# Altium PCB PCB1 asu racing team solo mission.PcbDoc
Units mm, origin at the board's own origin, x right, y up, seen from the top; angles counter-clockwise.
Board outline 44 x 44 mm, 4 copper layers (L1 (SIGNAL), L2 (GND), L3 (GND), L4 (Signal)), stack 1.57 mm thick; 35 components, 26 nets, 195 pads, 160 vias.
Unrouted connection lines stored in the file: 4.
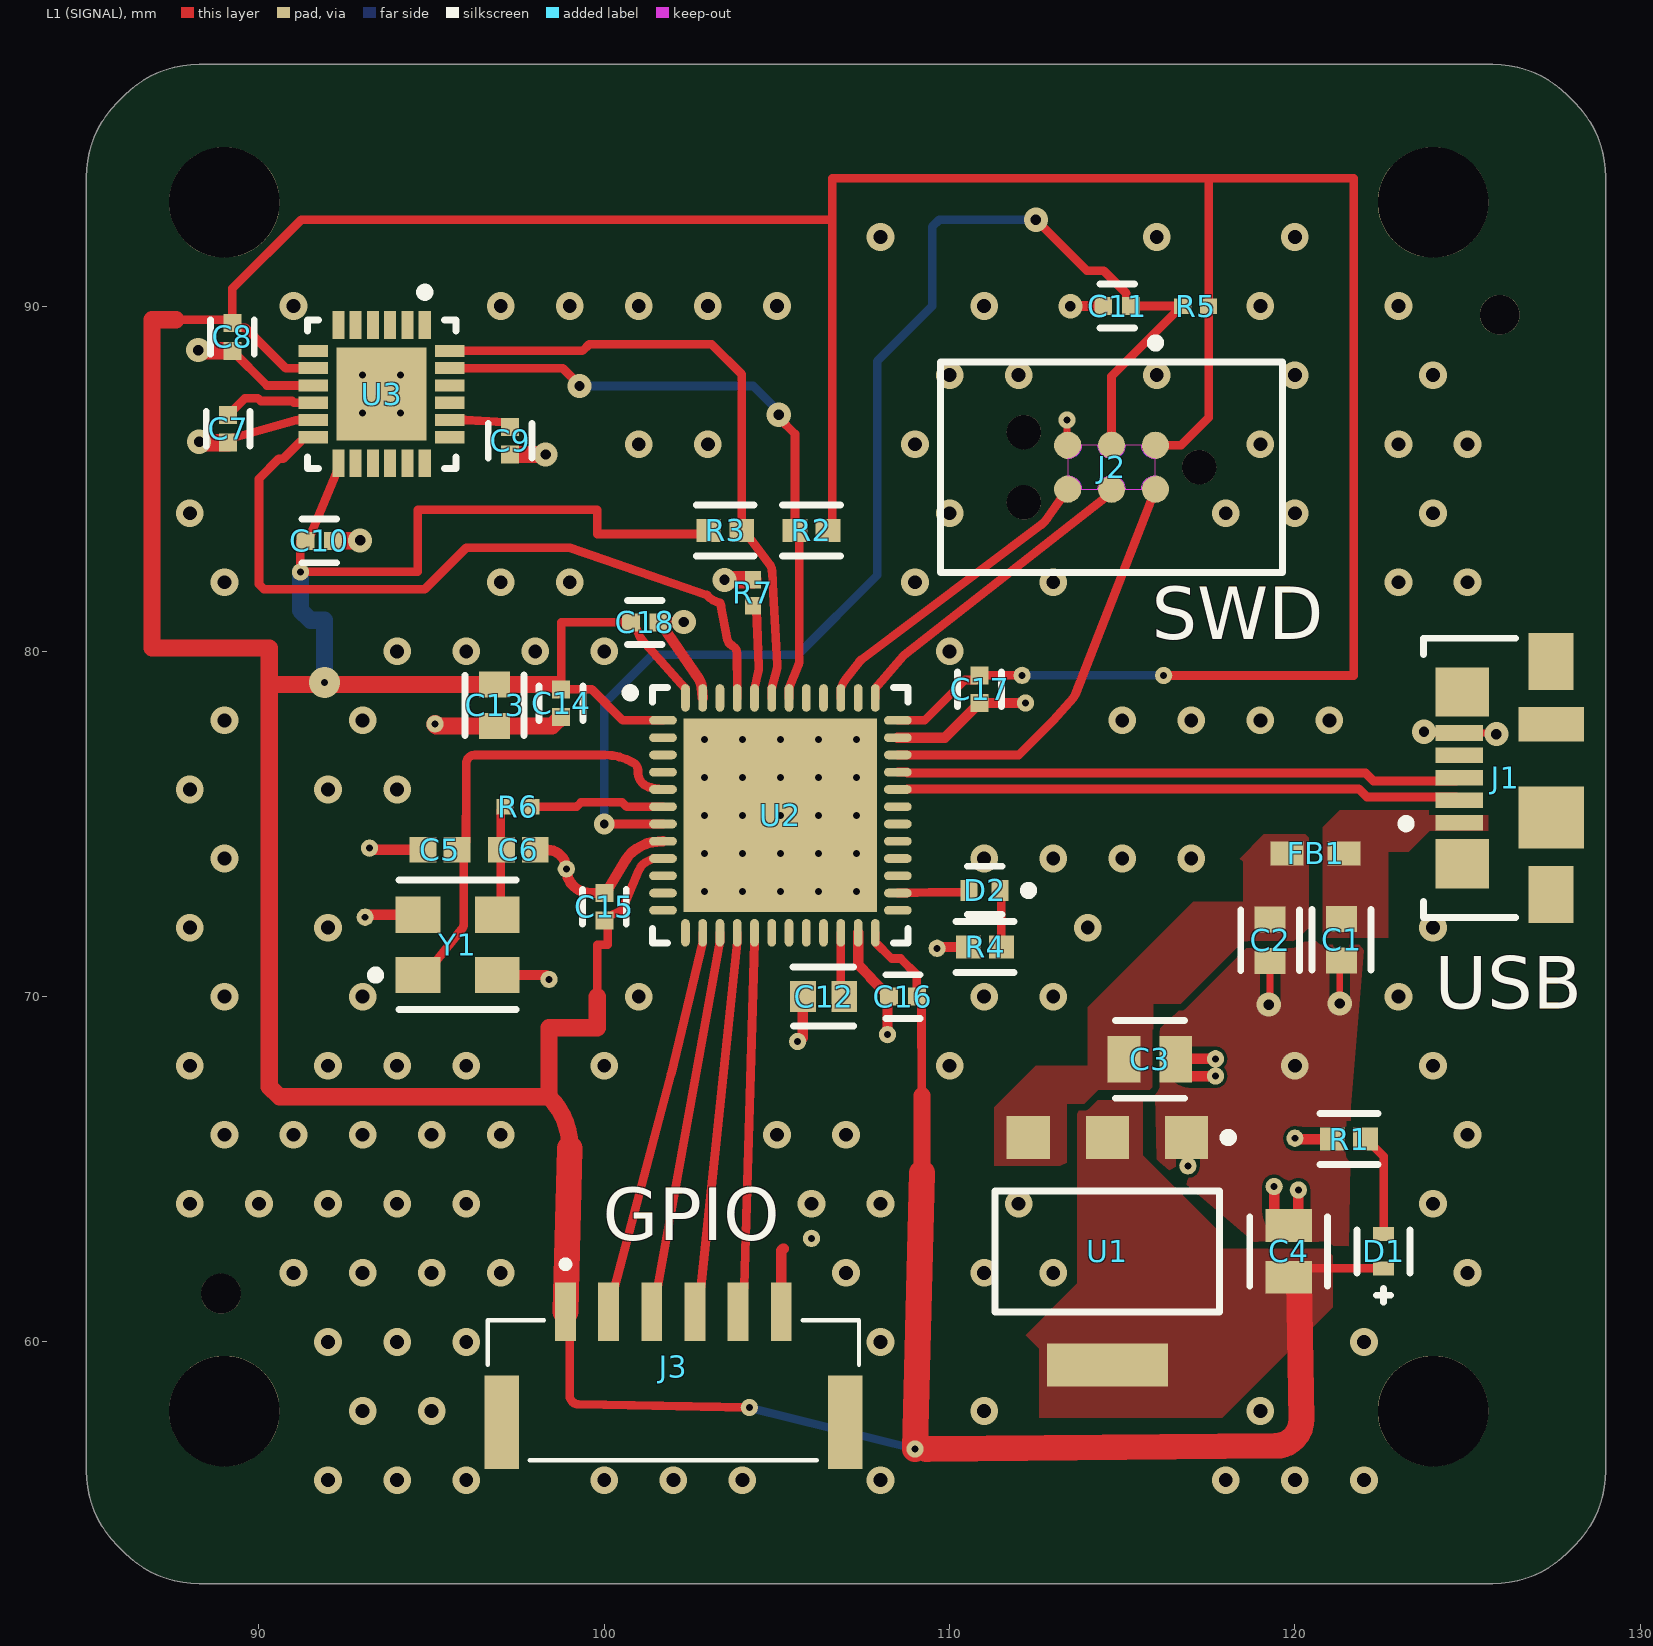
[diagram p0: L1 (SIGNAL) view]
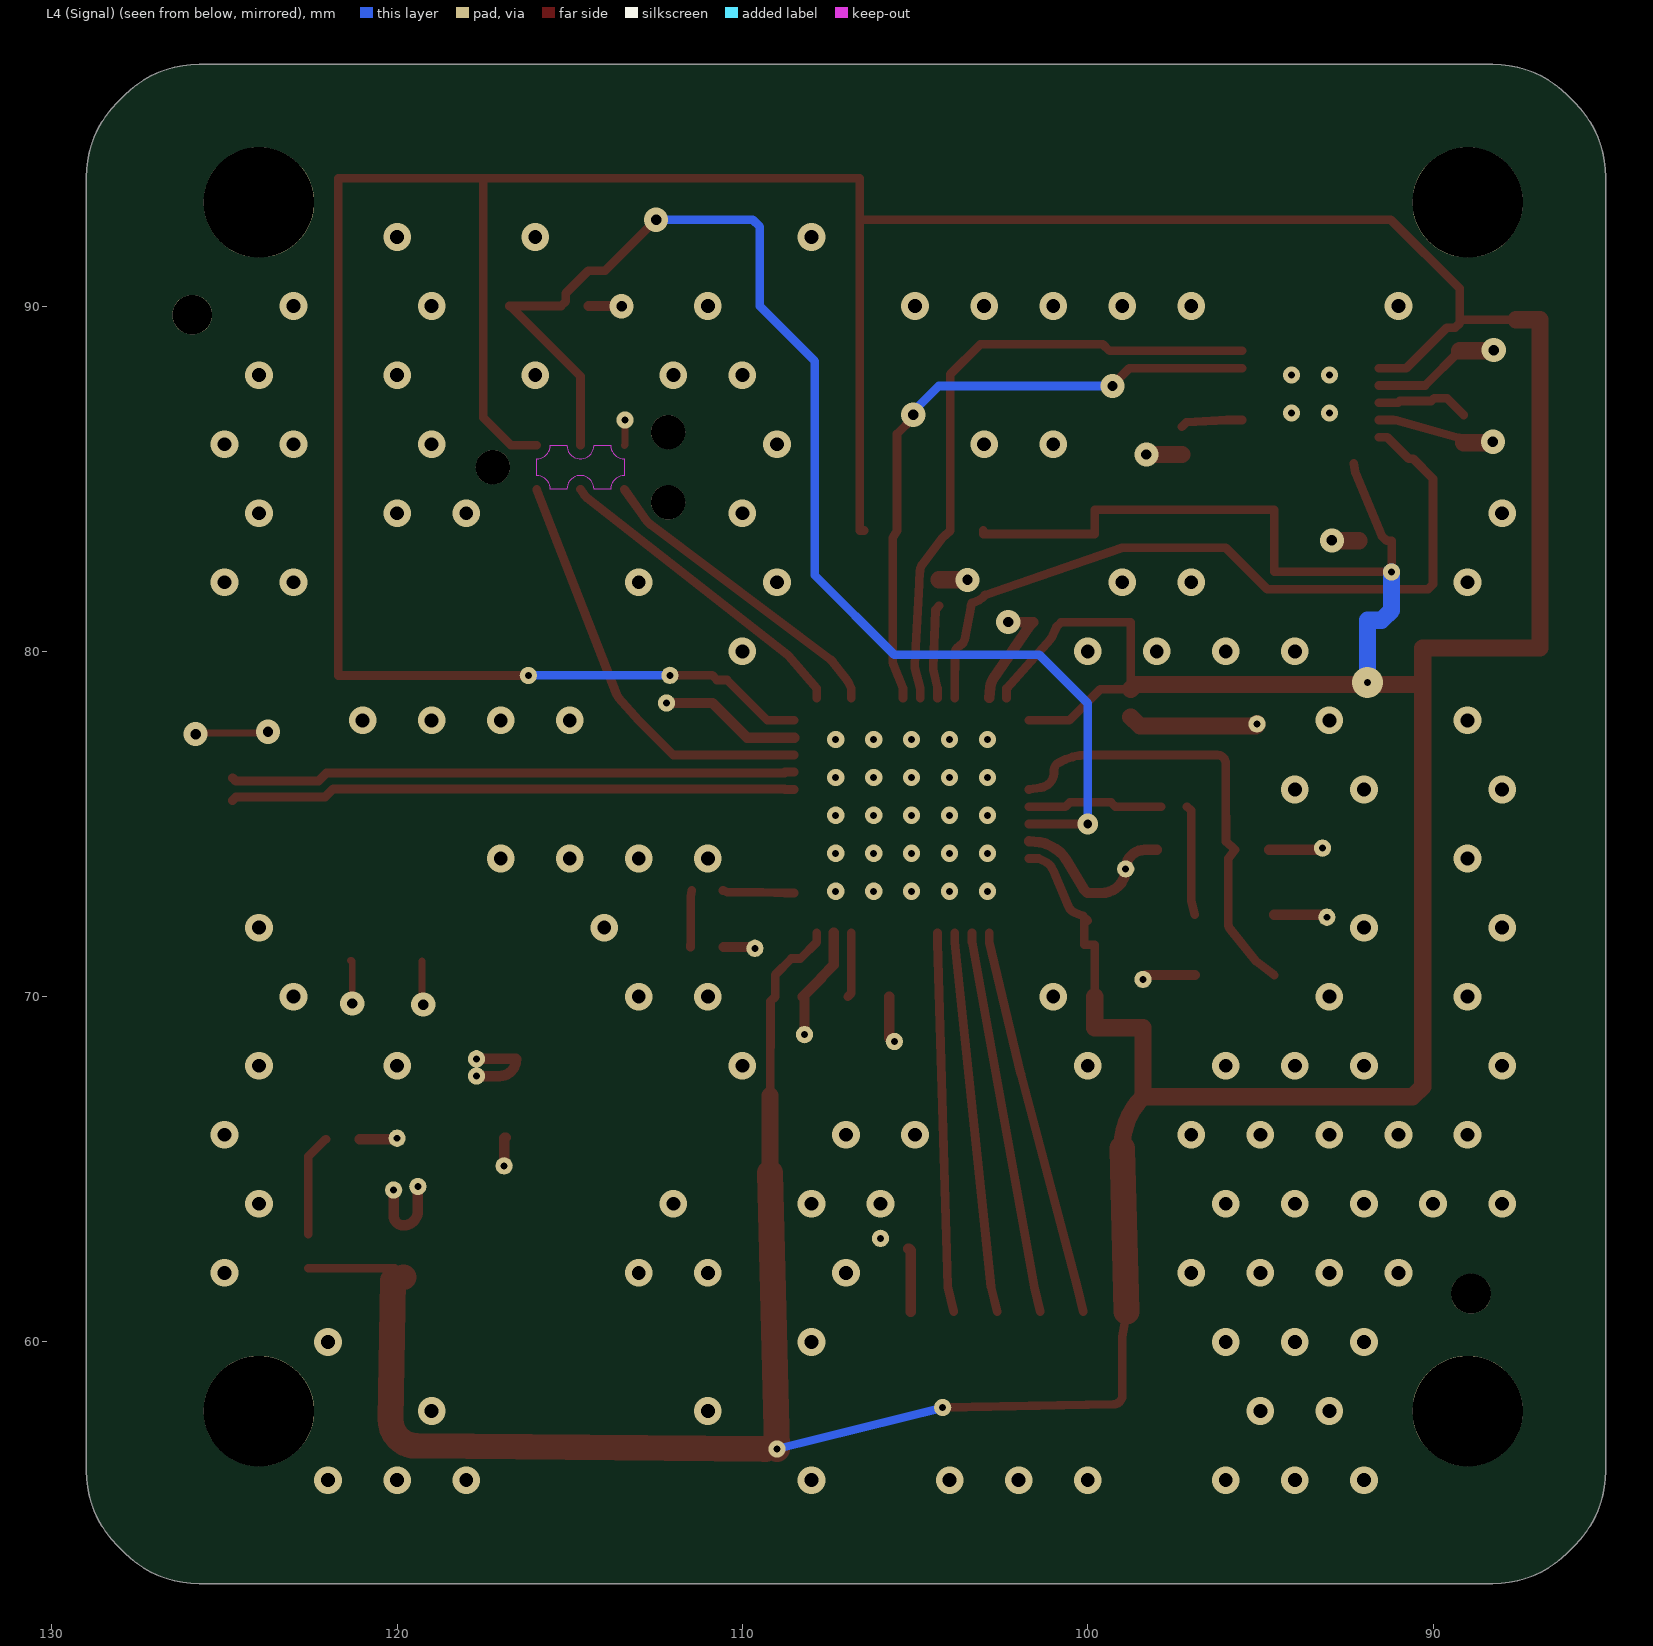
[diagram p1: L4 (Signal) view, seen from below]
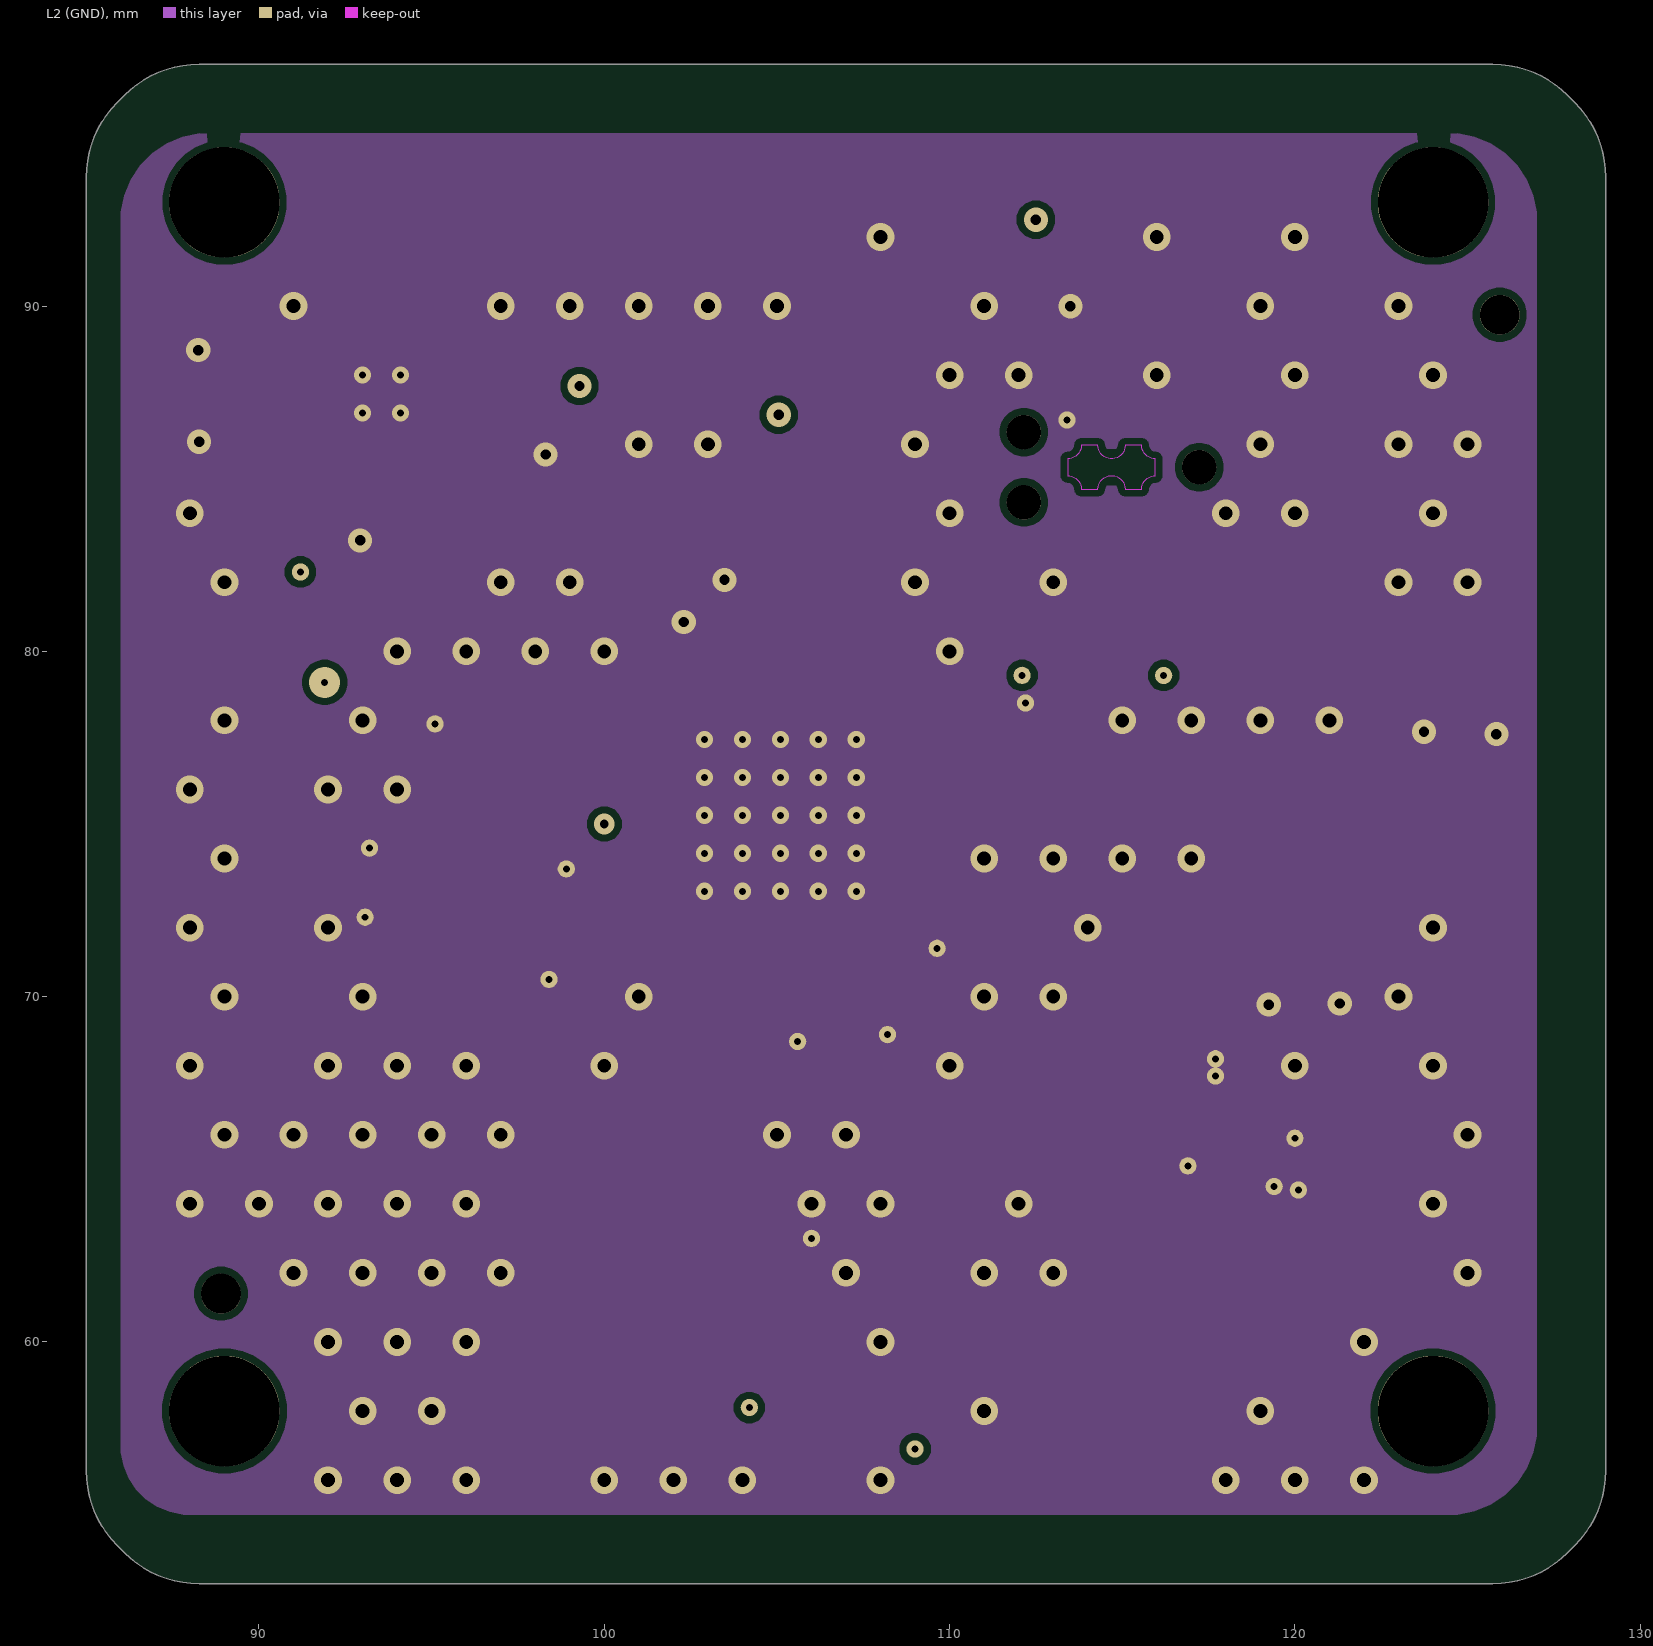
[diagram p2: L2 (GND)]
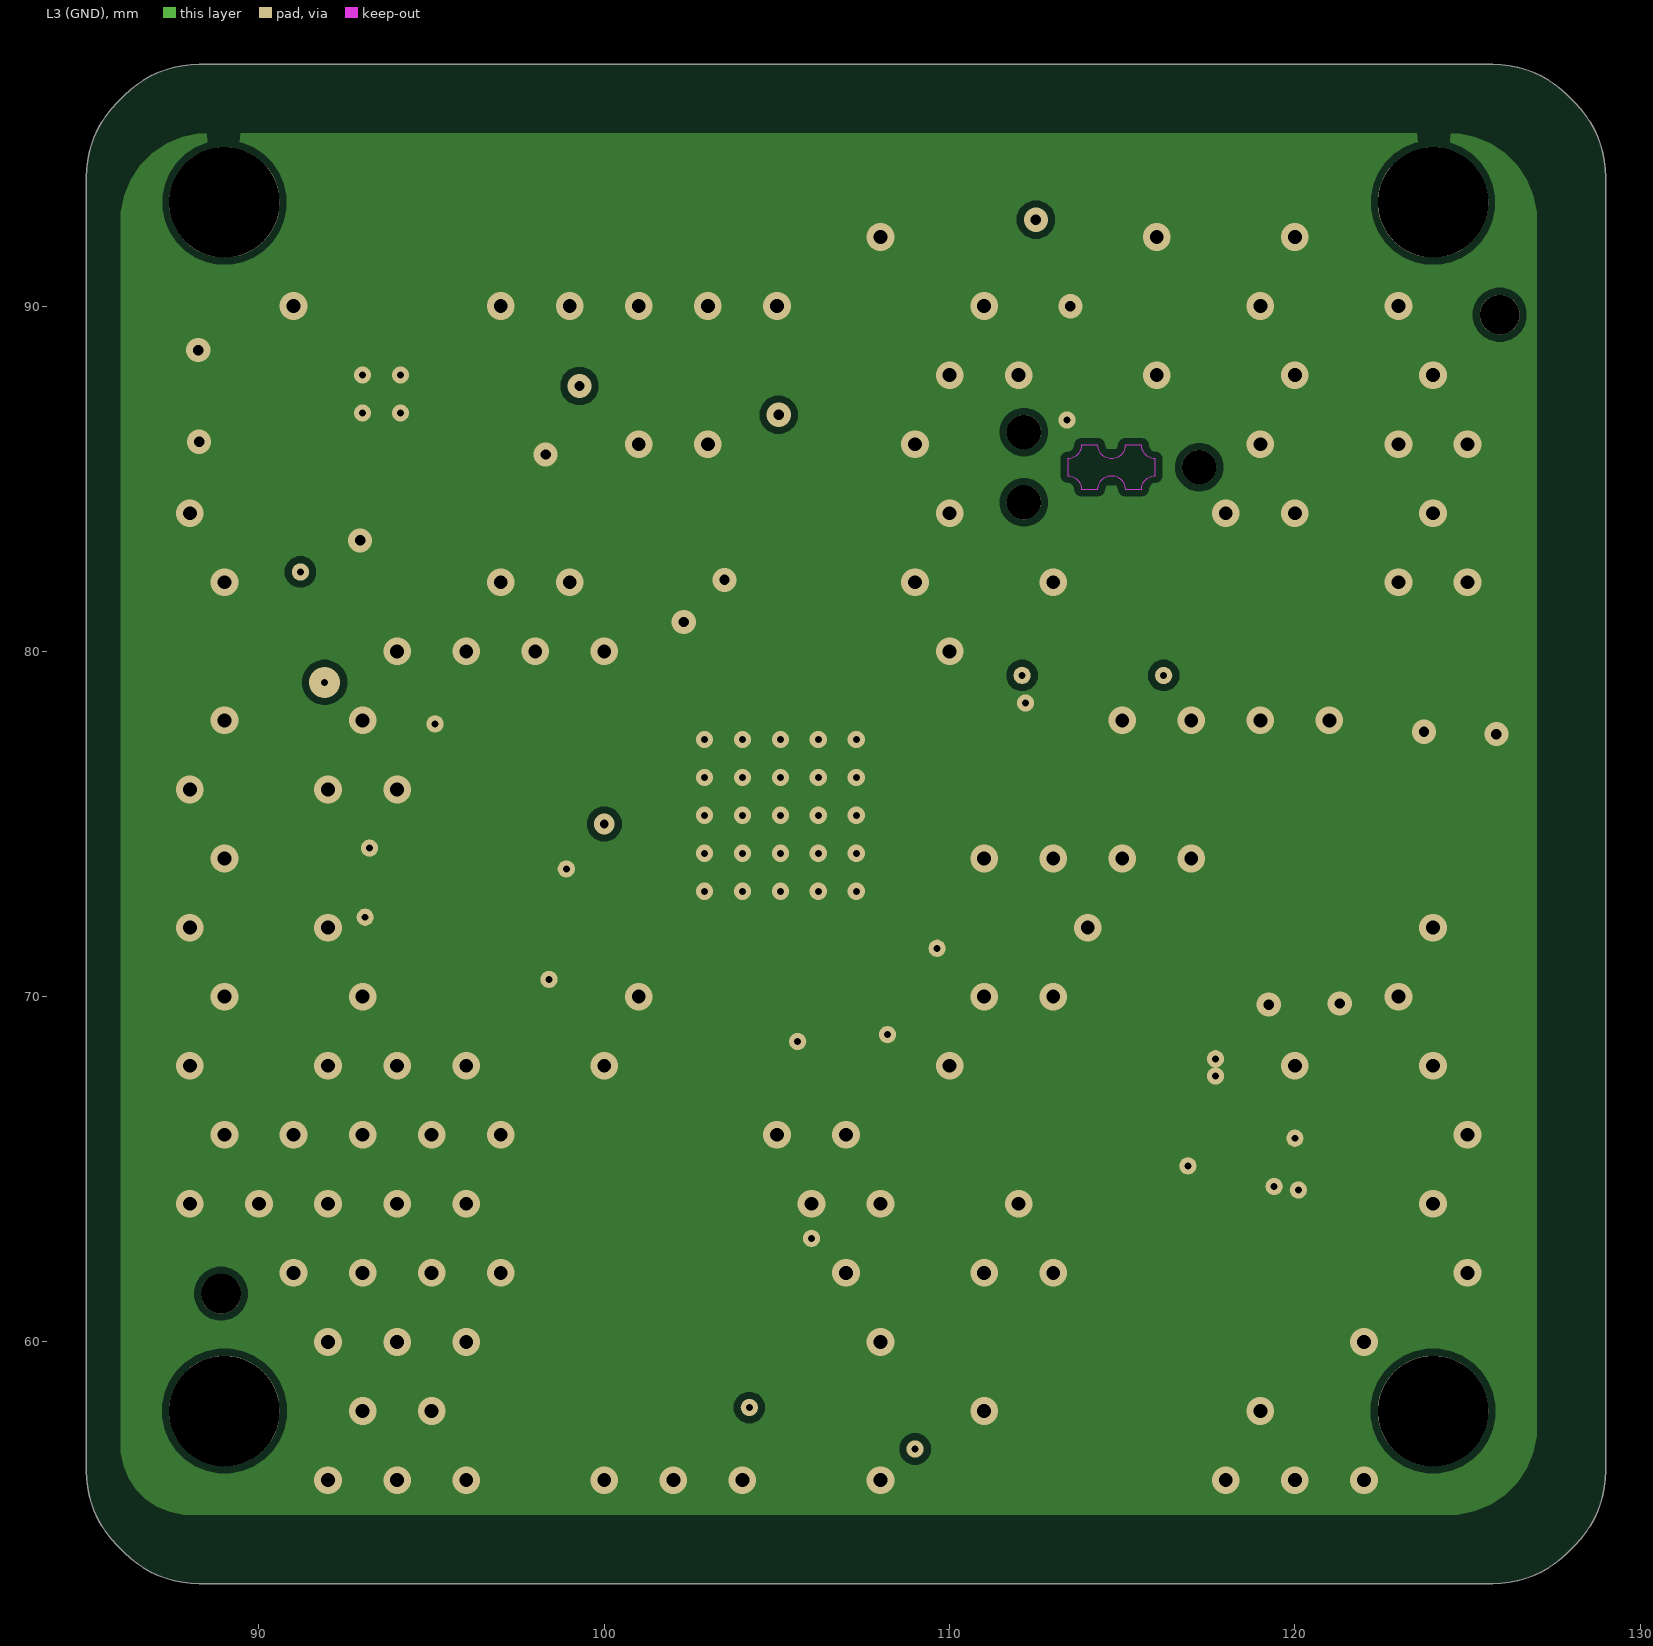
[diagram p3: L3 (GND)]
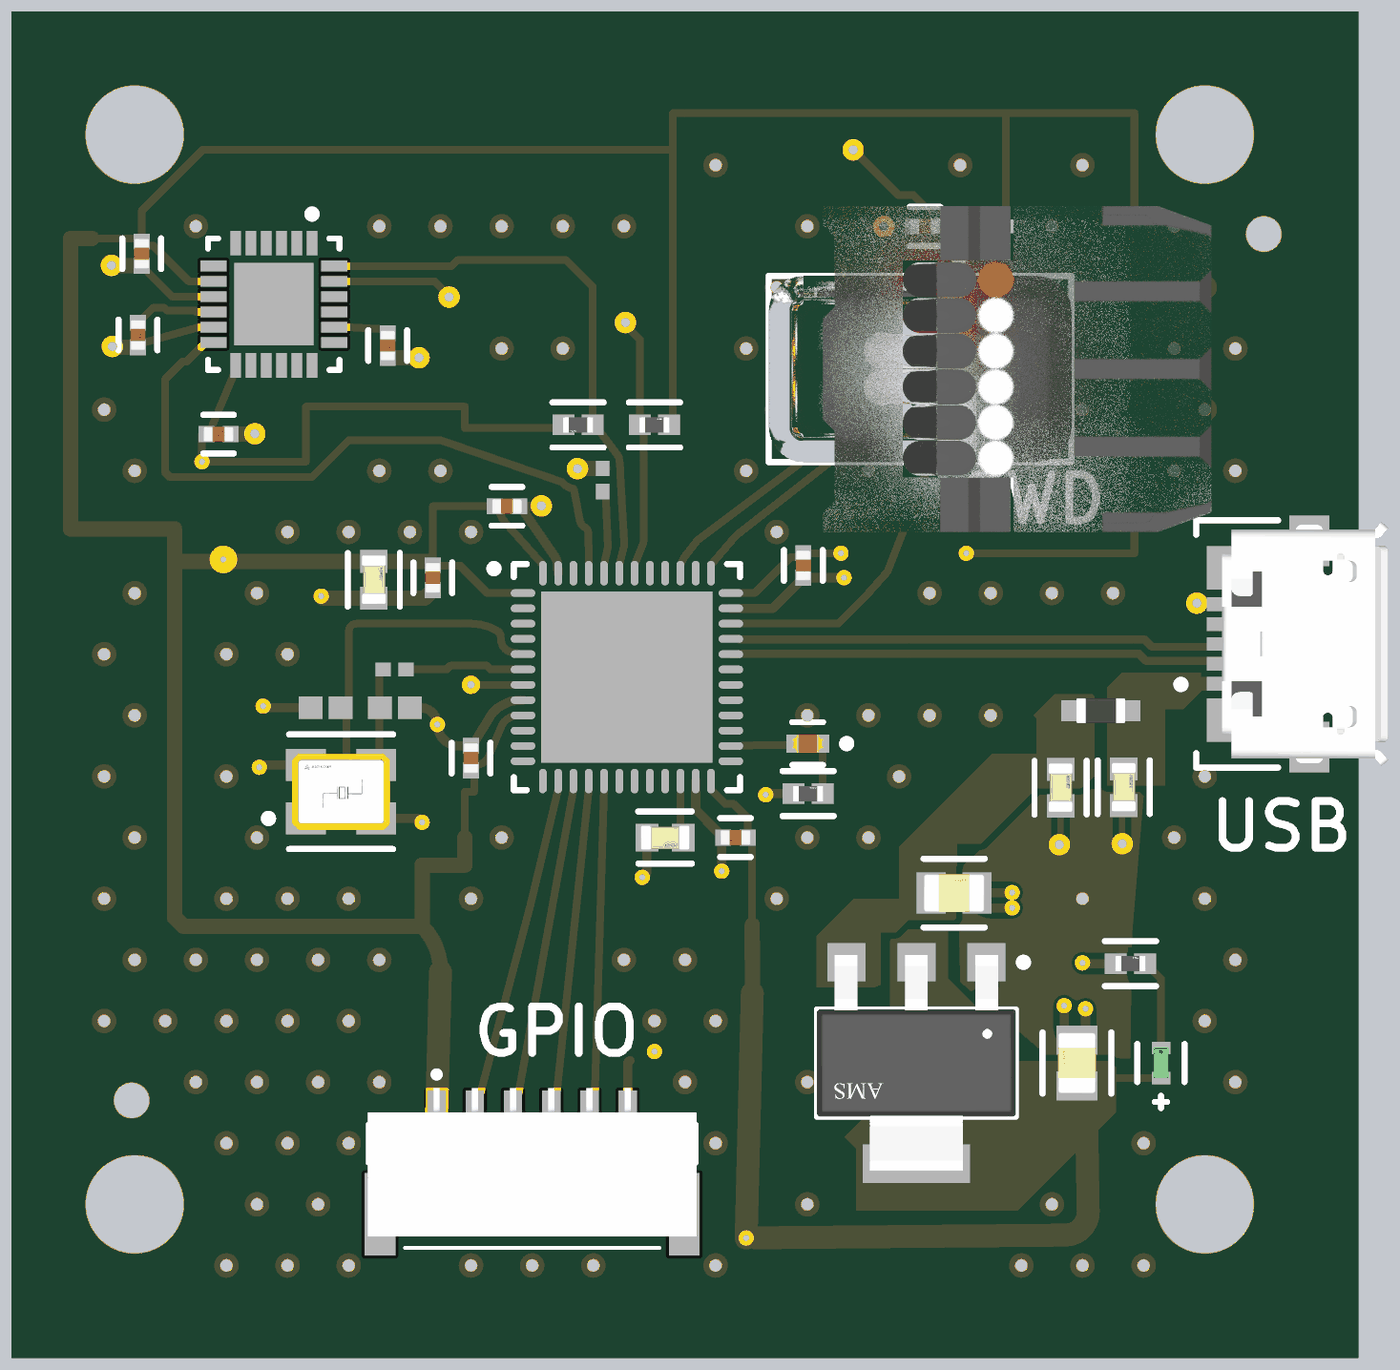
[diagram p4: 3D render of the assembled board from above, using the file's embedded part models]

## Layer stack, top to bottom
Top Solder: solder mask 0.0254, SM-001, Dk 4
L1 (SIGNAL): signal copper 0.035
Dielectric 1: prepreg 0.2, PP-017, Dk 4.6
L2 (GND): signal copper 0.0175
Dielectric 3: core 1.065, Core-039, Dk 4.6
L3 (GND): signal copper 0.0175
Dielectric 5: prepreg 0.2, PP-017, Dk 4.6
L4 (Signal): signal copper 0.035
Bottom Solder: solder mask 0.0254, SM-001, Dk 4

## Board outline
85.898,54.102 cw(c88.066,56.27) 85,56.27 85,93.73 cw(c88.066,93.73) 85.898,95.898 86.102,96.102 cw(c88.27,93.934) 88.27,97 125.73,97 cw(c125.73,93.934) 127.898,96.102 128.102,95.898 cw(c125.934,93.73) 129,93.73 129,56.27 cw(c125.934,56.27) 128.102,54.102 127.898,53.898 cw(c125.73,56.066) 125.73,53 88.27,53 cw(c88.27,56.066) 86.102,53.898

## Design rules (kind name [scope] priority, off if disabled: settings)
Clearance [All] p1: gap=0.2 ignorepadtopadclearanceinfootprint=FALSE
DiffPairsRouting [All] p1: maxlimit=0.254 minlimit=0.203 mostfreqgap=0.254 toplayer_maxgap=0.203 toplayer_prefgap=0.203 toplayer_minwidth=0.26 toplayer_maxwidth=0.26 toplayer_prefwidth=0.26 bottomlayer_maxgap=0.203 bottomlayer_prefgap=0.203 bottomlayer_minwidth=0.26 bottomlayer_maxwidth=0.26 bottomlayer_prefwidth=0.26 impedanceprofiledriven=TRUE impedanceprofileid={2AADE8E3-8F08-4A78-8AD9-7687EE1D7112} impedanceprofilevalue=90.000000 maxuncoupledlength=12.7
PolygonConnect [All] p1: connectstyle=Direct reliefconductorwidth=0.254 reliefentries=4 polygonreliefangle="90 Angle" airgapwidth=0.254
RoutingVias [All] p1: holewidth=0.3 width=0.7 viastyle="Through Hole" minholewidth=0.25 minwidth=0.55 maxholewidth=0.4 maxwidth=0.9
SolderMaskExpansion [All] p1: expansion=0 istentingtop=FALSE
SupplyNets "Schematic Supply Nets_3" [InNet('VBUS')] p1: voltage=0.000
SupplyNets "Schematic Supply Nets_2" [InNet('GND')] p2: voltage=0.000
SupplyNets "Schematic Supply Nets_1" [InNet('+5V')] p3: voltage=0.000
SupplyNets "Schematic Supply Nets" [InNet('+3V3')] p4: voltage=0.000
UnRoutedNet [All] p1: checkbadconnections=TRUE
Width [All] p1: maxlimit=1 minlimit=0.2 preferedwidth=0.3 midlayer1_minwidth=0.254 midlayer1_maxwidth=0.254 midlayer1_prefwidth=0.254 midlayer2_minwidth=0.254 midlayer2_maxwidth=0.254 midlayer2_prefwidth=0.254 minimp=50.000000 maximp=50.000000 favimp=50.000000
28 further rules are at their usual default settings.

## Classes and differential pairs
differential pair class DIFF_USB: USB_D
differential pair USB_D: +USB_D_P -USB_D_N

## Components (designator, comment, footprint, x,y, rotation, side; value= is the part's Value field where it differs from the comment)
C1 "2u2" FP-C0603C-CF-MFG 121.35,71.65 r270 top value="0.10 μF"
C2 "2u2" FP-C0603C-CF-MFG 119.284,71.636 r270 top value="0.10 μF"
C3 "22u" FP-C0805C106K4PACTU-MFG 115.8,68.184 r0 top
C4 "22u" FP-C0805C106K4PACTU-MFG 119.818,62.625 r90 top
C5 "10p" CAPC1005X56X25ML10T15 95.24,74.25 r0 top
C6 "10p" CAPC1005X56X25ML10T15 97.51,74.25 r180 top
C7 "100n" FP-C0402-BB-MFG 89.107,86.444 r270 top value="22 pF"
C8 "10n" FP-C0402-BB-MFG 89.229,89.104 r270 top value="22 pF"
C9 "2n2" FP-C0402-BB-MFG 97.275,86.1 r270 top value="22 pF"
C10 "100n" FP-C0402-BB-MFG 91.742,83.2 r0 top value="22 pF"
C11 "100n" FP-C0402-BB-MFG 114.85,90 r180 top value="22 pF"
C12 "2u2" FP-C0603C-CF-MFG 106.35,70 r180 top value="0.10 μF"
C13 "2u2" FP-C0603C-CF-MFG 96.824,78.438 r270 top value="0.10 μF"
C14 "100n" FP-C0402-BB-MFG 98.75,78.5 r270 top value="22 pF"
C15 "100n" FP-C0402-BB-MFG 100,72.6 r90 top value="22 pF"
C16 "100n" FP-C0402-BB-MFG 108.65,70 r180 top value="22 pF"
C17 "100n" FP-C0402-BB-MFG 110.869,78.905 r270 top value="22 pF"
C18 "100n" FP-C0402-BB-MFG 101.176,80.839 r0 top value="22 pF"
D1 "SM0402GC" FP-SM0402GC-MFG 122.568,62.625 r90 top
D2 "SML-P12VTT86R" FP-SML-P1-MFG 111.012,73.075 r180 top
FB1 "120R" "WE-CBF HF_0603_HC" 120.6,74.15 r180 top
J1 "473460001" FP-473460001-MFG 127.07,76.335 r90 top
J2 "TC2030-CTX-NL" FP-TC2030-CTX-NL-MFG 114.69,85.332 r180 top
J3 "SM06B-GHS-TB" JST_SM06B-GHS-TB 102,59 r0 top
R1 "1k" FP-RC0402-0_4-IPC_A 121.568,65.875 r0 top
R2 "2k2" FP-RC0402-0_4-IPC_A 106,83.5 r0 top
R3 "2k2" FP-RC0402-0_4-IPC_A 103.5,83.5 r180 top
R4 "1k" FP-RC0402-0_4-IPC_A 111.026,71.439 r0 top
R5 "10k" RESC1005X40X25LL05T10 117.125,90 r0 top
R6 "0R" RESC1005X40X25LL05T10 97.5,75.5 r0 top
R7 "10k" RESC1005X40X25LL05T10 104.306,81.696 r270 top
U1 "AMS1117-3.3" FP-AMS1117-IPC_C 114.568,62.625 r270 top
U2 "STM32F411CEU6" STM-UFQFPN48_L 105.1,75.25 r0 top
U3 "MPU-6050" IS-QFN-24_V 93.55,87.45 r270 top
Y1 "24MHZ" FP-ABM8-MFG 95.75,71.5 r0 top

## Footprints (in the part's own frame and the unit in brackets; to place one, negate y for a bottom-side part, rotate by r counter-clockwise, add the part's x,y. Pads: shape width x height; smd on the part's side, far side on the other; paste and mask are expansions set on the pad)
CAPC1005X56X25ML10T15 [mm] "Chip Capacitor, 2-Leads, Body 1.00x0.50mm, IPC Low Density"
  rect 0.78x0.74 smd: 1(-0.49,0) 2(0.49,0)
  body extent -0.55,-0.3 0.55,0.3, height 0.56
FP-473460001-MFG [mm]
  rect 0.45x1.38 smd paste+0 mask+0: 1(-1.3,2.31) 2(-0.65,2.31) 3(0,2.31) 4(0.65,2.31) 5(1.3,2.31)
  rect 1.425x1.55 smd paste+0 mask+0: 6(-2.487,2.225) 7(2.488,2.225)
  rect 1.65x1.3 smd paste+0 mask+0: 8(-3.375,-0.35) 11(3.375,-0.35)
  rect 1.8x1.9 smd paste+0 mask+0: 9(-1.15,-0.35)
  rect 1x1.9 smd paste+0 mask+0: 10(1.55,-0.35)
  silkscreen extent -4.05,0.67 4.04,3.97, body extent -4.3,-2.48 4.3,3.45, height 0.25
FP-ABM8-MFG [mm]
  rect 1.3x1.05 smd paste+0 mask+0: 1(-1.15,-0.875) 2(1.15,-0.875) 3(1.15,0.875) 4(-1.15,0.875)
  silkscreen extent -2.5,-1.87 1.7,1.88, body extent -1.9,-1.5 1.9,1.5, height 0.25
FP-AMS1117-IPC_C [mm]
  rect 1.25x1.25 smd paste+0 mask+0: 1(-3.295,2.29) 2(-3.295,0) 3(-3.295,-2.29)
  rect 1.25x3.5 smd paste+0 mask+0: 4(3.295,0)
  silkscreen extent -3.42,-3.25 1.75,3.63, body extent -3.9,-3.35 3.9,3.35, height 0.25
FP-C0402-BB-MFG [mm]
  rect 0.52x0.52 smd paste+0 mask+0: 1(-0.4,0) 2(0.4,0)
  silkscreen extent -0.5,-0.64 0.5,0.63, body extent -0.8,-0.4 0.8,0.4, height 0.25
FP-C0603C-CF-MFG [mm]
  rect 0.75x0.9 smd paste+0 mask+0: 1(-0.6,0) 2(0.6,0)
  silkscreen extent -0.87,-0.85 0.88,0.85, body extent -1.2,-0.6 1.2,0.6, height 0.25
FP-C0805C106K4PACTU-MFG [mm]
  rect 0.95x1.35 smd paste+0 mask+0: 1(-0.75,0) 2(0.75,0)
  silkscreen extent -1,-1.13 1,1.12, body extent -1.4,-0.85 1.4,0.85, height 0.25
FP-RC0402-0_4-IPC_A [mm]
  rect 0.715x0.672 smd paste+0 mask+0: 1(-0.479,0) 2(0.479,0)
  silkscreen extent -0.84,-0.74 0.84,0.74, body extent -1.04,-0.54 1.04,0.54, height 0.25
FP-SM0402GC-MFG [mil]
  rect 16x24 smd paste+0 mask+0: 1(-19.5,0) 2(19.5,0)
  silkscreen extent -58,-30 25,31, body extent -31,-18 31,18, height 10
FP-SML-P1-MFG [mm]
  rect 0.5x0.6 smd paste+0 mask+0: 1(-0.45,0) 2(0.45,0)
  silkscreen extent -1.4,-0.7 0.5,0.7, body extent -0.8,-0.43 0.8,0.43, height 0.25
FP-TC2030-CTX-NL-MFG [mil]
  round 30.98 smd paste-39370.1 mask+0: 1(-50,-25) 2(-50,25) 3(0,-25) 4(0,25) 5(50,-25) 6(50,25)
  round 39.02 hole 39.02 unplated paste-99999 mask+0: ""(-100,0) ""(100,-40) ""(100,40)
  Keep-Out Layer region: -34.51,-25 -15.49,-25 -13.96,-18.28 -9.66,-12.89 -3.45,-9.9 3.45,-9.9 9.66,-12.89 13.96,-18.28 15.49,-25 15.49,-25 34.51,-25 35.69,-19.07 39.05,-14.05 44.07,-10.69 50,-9.51 50,-9.51 50,9.51 44.07,10.69 39.05,14.05 35.69,19.07 34.51,25 34.51,25 15.49,25 13.96,18.28 9.66,12.89 3.45,9.9 -3.45,9.9 -9.66,12.89 -13.96,18.28 -15.49,25 -15.49,25 -34.51,25 -35.69,19.07 -39.05,14.05 -44.07,10.69 -50,9.51 -50,9.51 -50,-9.51 -44.07,-10.69 -39.05,-14.05 -35.69,-19.07 -34.51,-25
  silkscreen extent -195,-147 195,120, body extent -199,-124 199,124, height 10
IS-QFN-24_V [mm] "QFN, 24-Leads, Body 4x4mm, Pitch 0.5mm, Thermal Pad 2.7x2.6mm"
  rect 0.8x0.35 smd: 1(-2,1.25) 2(-2,0.75) 3(-2,0.25) 4(-2,-0.25) 5(-2,-0.75) 6(-2,-1.25) 13(2,-1.25) 14(2,-0.75) 15(2,-0.25) 16(2,0.25) 17(2,0.75) 18(2,1.25)
  rect 0.35x0.85 smd mask+0.102: 7(-1.25,-1.975) 8(-0.75,-1.975) 9(-0.25,-1.975) 10(0.25,-1.975) 11(0.75,-1.975) 12(1.25,-1.975) 19(1.25,1.975) 20(0.75,1.975) 21(0.25,1.975) 22(-0.25,1.975) 23(-0.75,1.975) 24(-1.25,1.975)
  rect 2.7x2.6 smd: 25(0,0)
  silkscreen extent -3.07,-2.15 2.15,2.15, body extent -2,-2 2,2, height 0.95
JST_SM06B-GHS-TB [mm]
  rect 0.6x1.7 smd paste+0 mask+0.102: 1(-3.125,1.875) 2(-1.875,1.875) 3(-0.625,1.875) 4(0.625,1.875) 5(1.875,1.875) 6(3.125,1.875)
  rect 1x2.7 smd paste+0 mask+0.102: MP1(-4.975,-1.325) MP2(4.975,-1.325)
  silkscreen extent -5.37,-2.43 5.37,3.35, body extent -5.38,-2.05 5.38,2.8, height 4.25
RESC1005X40X25LL05T10 [mm] "Chip Resistor, 2-Leads, Body 1.00x0.50mm, IPC High Density"
  rect 0.5x0.45 smd: 1(-0.375,0) 2(0.375,0)
  body extent -0.53,-0.27 0.53,0.28, height 0.4
STM-UFQFPN48_L [mm] "QFN, 48-Leads, Body 7.1x7.1mm, Pitch 0.5mm, Thermal Pad 5.6x5.6mm, IPC High Density"
  oval 0.8x0.25 smd: 1(-3.4,2.75) 2(-3.4,2.25) 3(-3.4,1.75) 4(-3.4,1.25) 5(-3.4,0.75) 6(-3.4,0.25) 7(-3.4,-0.25) 8(-3.4,-0.75) 9(-3.4,-1.25) 10(-3.4,-1.75) 11(-3.4,-2.25) 12(-3.4,-2.75) 25(3.4,-2.75) 26(3.4,-2.25) 27(3.4,-1.75) 28(3.4,-1.25) 29(3.4,-0.75) 30(3.4,-0.25) 31(3.4,0.25) 32(3.4,0.75) 33(3.4,1.25) 34(3.4,1.75) 35(3.4,2.25) 36(3.4,2.75)
  oval 0.25x0.8 smd: 13(-2.75,-3.4) 14(-2.25,-3.4) 15(-1.75,-3.4) 16(-1.25,-3.4) 17(-0.75,-3.4) 18(-0.25,-3.4) 19(0.25,-3.4) 20(0.75,-3.4) 21(1.25,-3.4) 22(1.75,-3.4) 23(2.25,-3.4) 24(2.75,-3.4) 37(2.75,3.4) 38(2.25,3.4) 39(1.75,3.4) 40(1.25,3.4) 41(0.75,3.4) 42(0.25,3.4) 43(-0.25,3.4) 44(-0.75,3.4) 45(-1.25,3.4) 46(-1.75,3.4) 47(-2.25,3.4) 48(-2.75,3.4)
  rect 5.6x5.6 smd: 49(0,0)
  silkscreen extent -4.47,-3.7 3.7,3.7, body extent -3.55,-3.55 3.55,3.55, height 0.6
"WE-CBF HF_0603_HC" [mm] "SMD EMI Suppression Ferrite  Bead, body 1.60x0.80mm"
  rect 0.95x0.7 smd: 1(-0.825,0) 2(0.825,0)
  body extent -0.8,-0.4 0.8,0.4, height 0.8

## Part data
C1 C2 C12 C13: library part CMP-2006-03811-3, "Capacitor; Ceramic; Cap; .100uF; Tol 10%; SMT; Vol-Rtg 16V; X7R; Tape and Reel", Capacitance="0.10 μF", Manufacturer=KEMET, Manufacturer Part Number=C0603C104K4RACTU, Package=C0603C-CF, Temperature="-55°C to +125°C", Temperature Characteristic=X7R, Temperature Coefficient=30ppm/°C, Temperature Range High=+125°C, Temperature Range Low=-55°C, Tolerance=0.1, Voltage Rating="16 V", Automotive=Yes, Automotive Grade="Grade 1", Category=Cap, ComponentLink2Description=Datasheet, ComponentLink2URL=https://api.kemet.com/component-edge/download/datasheet/C0603C100J5GACAUTO.pdf, Device Class L1="Passive Components", Device Class L2=Capacitors, Device Class L3="Ceramic Capacitors", Digikey Description="Capacitor; Ceramic; Cap; .100uF; Tol 10%; SMT; Vol-Rtg 16V; X7R; Tape and Reel", Height=0.87mm, Lead Free=Yes, Material=Ceramic, Mouser Description="Multilayer Ceramic Capacitors MLCC - SMD/SMT 16volts 0.1uF 10% X7R 10%", Octopart=https://octopart.com/c0603c104k4ractu-kemet-93067, RoHS=TRUE
C3 C4: library part CMP-03020-034671-1, "CAP CER 10UF 16V X5R 0805", Capacitance=10uF, Case Code (Imperial)=0805, Case Code (Metric)=2012, Dielectric=X5R, Dielectric Material=Ceramic, Max Operating Temperature=85°C, Min Operating Temperature=-55°C, Package Quantity=1, Tolerance=10%, Voltage=16V, Case/Package=0805, Construction=Flat, Contact Plating=Tin, Depth=1.25mm, Dissipation Factor=5%, Height=1.25mm, Lead Free="Lead Free", Length=2mm, Mount="Surface Mount", Number of Pins=2, Packaging="Tape and Reel", Radiation Hardening=No, REACH SVHC="No SVHC", Series=C, Termination=SMD/SMT, Thickness=0.055inch, Voltage Rating=16V, Voltage Rating (DC)=16V, Width=0.049inch
C5 C6: library part CMP-2008-02838-1, Manufacturer="AVX Interconnect / Elco", Part Number=0402YC821KAT2A
C7 C8 C9 C10 C11 C14 C15 C16 C17 C18: library part CMP-03020-013852-1, "C0402 22 pF X7R 10.00% 16 V", Capacitance="22 pF", Manufacturer=Kemet, Manufacturer Part Number=C0402C220K4RACTU, Package=C0402-BB, Temperature="-55°C to +125°C", Temperature Characteristic=X7R, Temperature Coefficient=15%, Temperature Range High=+125°C, Temperature Range Low=-55°C, Tolerance=0.1, Voltage Rating="16 V", Automotive=No, Category=Cap, ComponentLink2Description=Datasheet, ComponentLink2URL=https://content.kemet.com/datasheets/KEM_C1002_X7R_SMD.pdf, Device Class L1="Passive Components", Device Class L2=Capacitors, Device Class L3="Ceramic Capacitors", Height=0.55mm, Ipc Land Pattern Name=CAPC10050X50, Lead Free=Yes, Material=Ceramic, Mouser Description="Cap Ceramic 22pF 16V X7R 10% Pad SMD 0402 125C T/R", Octopart=https://octopart.com/c0402c220k4ractu-kemet-77858932, RoHS=TRUE
D1: library part CMP-35283-000001-2, "LED GREEN CLEAR 0402 SMD", Case Code (Imperial)=0402, Case Code (Metric)=1005, Color=Green, Forward Voltage=1.9V, Lens Color=Colorless, Test Current=20mA, Case/Package=0402, Dominant Wavelength=572nm, Height=0.71mm, Length=1mm, Lens Size=1mm, Lens Style=Flat, Lens Transparency=Clear, Luminous Intensity=28.5mcd, Mount="Surface Mount", Packaging="Tape and Reel", Viewing Angle=130°, Width=0.5mm
D2: library part CMP-08952-000002-1, "LED RED CLEAR 0402 SMD", Colour=Red, Forward Current=20mA, Forward Voltage=2V, Manufacturer=Rohm, Package=SML-P1, Power Dissipation=50mW, Reverse Voltage=5V, Temperature="-40°C to +85°C", Temperature Range High=+85°C, Temperature Range Low=-40°C, Automotive=No, Category=Diode, ComponentLink2Description=Datasheet, ComponentLink2URL=https://www.rohm.com/datasheet/SML-P12VT(R)/sml-p1-e, Device Class L1=Optoelectronics, Device Class L2=LEDs, Device Class L3=unset, Digikey Description="LED RED CLEAR 0402 SMD", Height=0.25mm, Lead Free=Yes, Led Orientation="Top View", Luminous Intensity=60mcd, Manufacturer Part Number=SML-P12VTT86R, Mouser Description="SML-P1 Series Red 0402 Clear 60 mcd 2V Surface Mount PICOLED? LED", Octopart=https://octopart.com/sml-p12vtt86r-rohm-34112315, RoHS=TRUE, Wavelength=630nm
FB1: library part CMP-0220-00101-3, "Ferrite Bead (emi Suppression), 1.6X0.8X0.8MM (0603), 600O Impedance At 100 Mhz", Case Code (Imperial)=0603, Case Code (Metric)=1608, Case/Package=SMD/SMT, Current Rating=400mA, DC Resistance (DCR)=220mΩ, Max Current Rating=500mA, Max Operating Temperature=125°C, Min Operating Temperature=-55°C, Resistance=350mΩ, Test Frequency=100MHz, Tolerance=25%, Core Material=Ferrite, Depth=800µm, Height=800µm, Impedance=600Ω, Lead Free="Lead Free", Length=1.6mm, Max DC Current=500mA, Mount="Surface Mount", Number of Lines=1, Number of Pins=2, REACH SVHC=Unknown, RoHS=Compliant, Termination=SMD/SMT, Width=800µm
J1: library part CMP-2000-05246-2, "CONN RCPT USB2.0 MICRO B SMD R/A", Current Rating=1.8A, Manufacturer=Molex, Package=0, Temperature="-30°C to +85°C", Temperature Range High=+85°C, Temperature Range Low=-30°C, Voltage Rating=30V, Automotive=No, Category=Conn, ComponentLink2Description=Datasheet, ComponentLink2URL=https://www.molex.com/webdocs/datasheets/pdf/en-us/0473460001_IO_CONNECTORS.pdf, Conn Orientation="Right Angle", Contact Material=Gold,Nickel, Device Class L1=Connectors, Device Class L2="USB Connectors", Device Class L3=unset, Digikey Description="CONN RCPT USB2.0 MICRO B SMD R/A", Footprint Url=https://www.molex.com/pdm_docs/sd/473460001_sd.pdf, Height=2.945mm, Is Female=yes, Lead Free=Yes, Manufacturer Part Number=473460001, Number Of Contacts=5, Octopart=https://octopart.com/47346-0001-molex-7164928, Pitch=0.65mm, RoHS=TRUE, Shielding=true, Usb Standard="USB 2.0"
J2: library part CMP-205963-000001-1, "6-Pin “No legs” TC2030 Plug-of-Nails™ Cable for use with ARM Cortex processors"
J3: "Connector Header Surface Mount, Right Angle 6 position 0.049 (1.25mm)", Package=None, Check_prices=https://www.snapeda.com/parts/SM06B-GHS-TB/JST/view-part/?ref=eda, MF="JST Sales", MP=SM06B-GHS-TB, SnapEDA_Link=https://www.snapeda.com/parts/SM06B-GHS-TB/JST/view-part/?ref=snap
R1 R2 R3 R4: library part CMP-2002-07472-3, "RES 1K OHM 1% 1/16W 0402", Case Code (Imperial)=0402, Case Code (Metric)=1005, Max Operating Temperature=155°C, Max Power Dissipation=63mW, Min Operating Temperature=-55°C, Power Rating=62.5mW, Resistance=1kR, Resistance Tolerance=1%, Resistor Type="Thick Film", Temperature Coefficient=100ppm/°C, Voltage Rating=50V, Case/Package=0402, Construction=Rectangular, Depth=0.5mm, Features="Moisture Resistant", Height=0.32mm, Lead Free="Lead Free", Length=1mm, Military Standard=Not, Number of Pins=2, Number of Terminations=2, Packaging="Tape and Reel", Reach SVHC Compliant=Yes, RoHS Compliant=Yes, Series=RC, Size Code=0402, Technology="THICK FILM", Termination=SMD/SMT, Tolerance=1%, Voltage Rating (DC)=50V, Width=0.5mm
R5 R6 R7: library part CMP-2002-07353-1, Manufacturer="Yageo / Phycomp", Part Number=RC0402FR-0710KL
U1: library part CMP-209535-000001-1, "LDO Voltage Regulators 1A, 3.3V", Dropout Voltage=1.1V, Manufacturer="Advanced Monolithic Systems", Max Junction Temp=+125°C, Max Power Dissipation=1.2W, Max Supply Voltage=15V, Nominal Supply Current=5mA, Output Current=1A, Output Voltage=3.3V, Package=AMS1117, Temperature="-40°C to +125°C", Temperature Range Low=-40°C, Automotive=No, Category=IC, ComponentLink2Description=Datasheet, ComponentLink2URL=http://www.advanced-monolithic.com/pdf/ds1117.pdf, Device Class L1="Integrated Circuits (ICs)", Device Class L2="Power Management ICs", Device Class L3="Voltage Regulators - Linear", Height=1.8mm, Ipc Land Pattern Name=SOT229P700X180-4, Lead Free=Yes, Manufacturer Part Number=AMS1117-3.3, Number Of Outputs=1, Octopart=https://octopart.com/ams1117-3.3-advanced+monolithic+systems-25899300, Output Type=Fixed, RoHS=TRUE, Standoff Height=0.64mm, Temperature Range High=+125°C
U2: library part CMP-0243-00165-1, "ARM Cortex-M4 32-bit MCU+FPU, 512 KB Flash, 128 KB RAM, 36 I/Os, 48-Pin UFQFPN, -40 to 85 degC, Tray", I/Os (High Current)=36, Operating Frequency(F) (Processor speed) (MHz)=100, Package Description=UFQFPN48, Package Reference="48-Pin Ultra Thin Fine Pitch Quad Flat No-Lead, 7 x 7 x 0.6 mm Body, 0.5 mm Pitch, Exposed Pad", Supply Voltage(Vcc) min (V)=1.7, ComponentLink1Description="Manufacturer URL", ComponentLink1URL=http://www.st.com/, ComponentLink2Description=Datasheet, ComponentLink2URL=http://www.st.com/st-web-ui/static/active/en/resource/technical/document/datasheet/DM00115249.pdf, Core="ARM Cortex-M4", DatasheetVersion="Rev. 6", FLASH Size (Prog) (kB)=512, Internal RAM Size (kB)=128, Mounting Technology="Surface Mount", Packing=Tray
U3: library part CMP-1753-00002-2, "3-Axis Gyroscope, Accelerometer and a Digital Motion Processor(TM) (DMP), 2.375 to 3.46 V, -40 to 85 degC, 24-Pin QFN, RoHS, Tape and Reel", Manufacturer=InvenSense, Standard Package=5,000, Category=Sensors,Transducers, Datasheet URL=http://datasheet.octopart.com/MPU-6050-InvenSense-datasheet-14421344.pdf, Datasheet Version="Rev. 3.3, 05/2012", Dynamic Catalog=MPU-6000™Series, Family=Multifunction, Featured Product=MPU-60506-Axis,IntegratedI²CSolution, Manufacturer URL=http://www.invensense.com/, Online Catalog=MPU-6000™Series, Other Names="1428-1007-2 / MPU6050", Output Type=Digital, Sensor Type=MotionTracking, Unit PriceUSD=Digital
Y1: library part CMP-27762-000036-1, "Crystal 24MHz ±20ppm 18pF SMD-4 3.2mm x 2.5mm", Case/Package=CSMD, ESR (Equivalent Series Resistance)=50R, Frequency=24MHz, Frequency Stability=50ppm, Frequency Tolerance=20ppm, Load Capacitance=18pF, Max Operating Temperature=70°C, Min Operating Temperature=-20°C, Operating Frequency="24 MHz", Package Quantity=1000, Resistor Type=Ceramic, Accuracy=20ppm, Depth=2.5mm, Height=0.031inch, Lead Free="Lead Free", Length=3.2mm, Mount="Surface Mount", Number of Pins=4, Packaging="Tape and Reel", Radiation Hardening=No, REACH SVHC="No SVHC", RoHS Compliant=Yes, Series=ABM8, Series Resistance=50R, Termination=SMD/SMT, Tolerance=20ppm, Width=2.5mm

## Free pads (board coordinates)
  round 3.2 hole 3.2: 1(89,58) 1(89,93) 1(124,58) 1(124,93)
  round 0.5 hole 0.2: 2(113.4,86.7) 3(117.7,68.2) 4(117.7,67.7) 5(116.9,65.1) 6(120.1,64.4) 7(119.4,64.5) 8(120,65.9) 9(106,63) 10(109.639,71.4) 11(108.2,68.9) 12(105.6,68.7) 13(98.4,70.5) 14(98.9,73.7) 15(93.2,74.3) 16(93.075,72.3) 17(95.1,77.9) 18(112.2,78.505) 19(104.2,58.1) 20(109,56.9) 27(91.2,82.3) 28(112.1,79.305) 29(116.2,79.302)
  round 0.9 hole 0.2: 25(91.9,79.1)
  round 1.152 hole 1.152: TH(88.9,61.4) TH(125.93,89.748)

## Via types
v1: diameter 0.8, hole 0.4, L1 (SIGNAL) to L4 (Signal), tented both sides, 116 vias
v2: diameter 0.5, hole 0.2, L1 (SIGNAL) to L4 (Signal), 29 vias
v3: diameter 0.7, hole 0.3, L1 (SIGNAL) to L4 (Signal), 14 vias
v4: diameter 0.6, hole 0.25, L1 (SIGNAL) to L4 (Signal), 1 vias

## Nets (pads, with @x,y where several pads share a name; then routed paths per layer and width w, separated by ;. In a path a pad name is that pad's centre, name@x,y a point inside that pad or via, vN(x,y) a via of type N, cw(c..) or ccw(c..) an arc to the next point about the centre after c; other vN are vias at no path point)
+3V3: C4.1 C8.1 C10.1 C13.1 C14.1 C15.1 C16.1 C17.1 C18.1 D1.1 J2.1 J3.1 pad.19 pad.20 pad.25 pad.27 pad.28 pad.29 R2.2 R3.2 R5.2 U1.2 U1.4 U2.1 U2.9 U2.24 U2.36 U2.48 U3.8 U3.13 | length 223.7
  L1 (SIGNAL) w0.25: 87.6,89.6 C8.1@89.229,89.6 ; U3.8 90.775,88.2 89.606,89.369 89.364,89.369 C8.1 C8.1@89.229,89.6 ; U3.13 92.25,85.175 91.477,83.335 C10.1 91.2,83.2 pad.27 94.6,82.3 94.6,84.1 99.8,84.1 99.8,83.4 103.021,83.4 R3.2 ; J3.1 99,60.15 99,58.445 ccw(c99.25,58.445) 99.245,58.195 pad.19 ; 99.8,70 99.8,71.5 100.1,71.5 100.1,72.2 C15.1 100.135,72.335 100.386,72.44 ccw(c100.26,72.74) 100.559,72.613 101.011,73.676 cw(c101.425,73.5) 101.229,73.905 101.425,74 U2.9 ; U2.1 100.538,78 99.638,78.9 C14.1 98.75,80.839 C18.1 100.911,80.704 101.016,80.453 ccw(c101.316,80.579) 101.073,80.363 102.35,78.925 U2.48 ; R2.2 106.6,83.5 106.6,92.5 ; U2.24 107.85,71.575 108.32,71.105 108.58,71.105 109.05,70.635 C16.1 109.185,69.865 109.198,67.131 ; U2.36 109.275,78 110.445,79.17 110.734,79.17 C17.1 pad.28 pad.28@112.1,79.3 ; J2.1 116.705,85.967 117.5,86.762 R5.2 117.5,93.7 ; pad.29 121.7,79.302 121.7,93.7 117.5,93.7 ; C4.1 120.073,62.13 D1.1 ; C8.1@89.229,89.6 89.229,90.507 91.222,92.5 106.6,92.5 ; 106.6,92.5 106.6,93.7 117.5,93.7
  L1 (SIGNAL) w0.5: 87.6,89.6 86.9,89.6 86.9,80.1 90.3,80.1 90.3,79.038 ; C14.1 98.612,79.038 C13.1 90.3,79.038 ; 99,65.6 99,65.651 ccw(c96.951,65.651) 98.4,67.1 ; 99.8,70 99.8,69.1 98.4,69.1 98.4,67.1 ; 109.198,67.131 109.2,64.9 ; 90.3,79.038 90.3,67.393 90.593,67.1 98.4,67.1
  L1 (SIGNAL) w0.75: J3.1 99,65.6 ; pad.20 109,56.911 109.2,64.9 ; 109.326,56.903 cw(c109.388,56.155) 109.38,56.905 ; 109.381,56.905 119.446,56.993 ccw(c119.437,57.743) 120.187,57.756 120.118,61.775 C4.1
  L4 (Signal) w0.25: pad.19 pad.20 ; pad.28 116.2,79.305 pad.29@116.2,79.3
  L4 (Signal) w0.5: pad.27 91.2,81.193 91.493,80.9 91.9,80.9 pad.25
+5V: C2.1 C3.1 FB1.2 U1.3
GND: C1.2 C2.2 C3.2 C4.2 C5.1 C6.1 C7.2 C8.2 C9.2 C10.2 C11.2 C12.2 C13.2 C14.2 C15.2 C16.2 C17.2 C18.2 J1.5 J2.5 J3.6 pad.2 pad.3 pad.4 pad.5 pad.6 pad.7 pad.8 pad.9 pad.10 pad.11 pad.12 pad.13 pad.14 pad.15 pad.16 pad.17 pad.18 R1.1 R4.1 R7.1 U1.1 U2.8 U2.23 U2.35 U2.47 U2.49 U3.1 U3.9 U3.11 U3.18 U3.25 Y1.2 Y1.4 | length 52.5
  L1 (SIGNAL) w0.2: pad.2 113.4,85.987 ccw(c113.42,85.987) J2.5 ; pad.3@117.7,68.184 pad.3 ; v3(119.243,69.769) cw(c119.274,69.769) 119.274,69.8 119.284,69.8 C2.2 ; v3(121.3,69.8) 121.3,71 cw(c121.35,71) C1.2 ; v3(123.74,77.67) 123.728,77.689 ccw(c123.761,77.637) 123.7,77.637 123.7,77.6 cw(c123.735,77.6) 123.735,77.635 J1.5 125.765,77.635 cw(c125.765,77.6) 125.8,77.6 125.8,77.633 125.817,77.633 v3(125.835,77.603)
  L1 (SIGNAL) w0.25: C7.2 89.242,86.179 91.062,86.688 cw(c91.15,86.375) 91.15,86.7 91.275,86.7 U3.11 ; C8.2 90.233,87.7 U3.9
  L1 (SIGNAL) w0.3: pad.16@93,72.3 cw(c93.075,72.3) 93.075,72.375 Y1.4 ; pad.15 ccw(c93.25,74.3) 93.25,74.25 C5.1 ; Y1.2 98.275,70.625 cw(c98.275,70.5) pad.13 ; C6.1 98.35,74.25 cw(c98.35,73.7) pad.14 ccw(c99.6,73.7) 99.6,73 C15.2 100.11,73.11 100.633,73.977 cw(c101.425,73.5) 101.022,74.332 101.218,74.427 cw(c101.425,74) 101.385,74.473 U2.8 ; v3@102.3,80.9 cw(c102.239,80.9) 102.239,80.839 C18.2 101.686,80.729 102.741,79.194 cw(c102.35,78.925) 102.823,78.965 U2.47 ; v3(102.301,80.852) v3@102.301,80.9 ; J3.6 105.125,62.625 cw(c105.2,62.625) 105.2,62.7 ; pad.12 ccw(c105.6,68.85) 105.75,68.85 C12.2 ; U2.23 107.35,70.92 107.716,70.554 107.716,70.534 C16.2 ccw(c108.25,69.95) 108.2,69.95 pad.11 ; U2.35 109.864,77.5 C17.2 pad.18 pad.18@112.2,78.5 ; pad.10@109.6,71.4 cw(c109.639,71.4) 109.639,71.439 R4.1 ; v3(113.497,89.994) 113.497,90 113.5,90 C11.2 ; C3.2 ccw(c117.034,68.184) 117.034,67.7 pad.4 ; C3.2@116.567,68.2 pad.3 ; U1.1 cw(c116.858,65.878) 116.9,65.878 pad.5 ; pad.7 119.4,63.793 ccw(c119.818,63.793) C4.2 ccw(c119.818,63.657) 120.1,63.657 pad.6 ; pad.8 ccw(c120.025,65.9) 120.025,65.875 R1.1
  L1 (SIGNAL) w0.5: v3(88.239,88.722) 88.222,88.722 ccw(c88.222,88.7) 88.2,88.704 C8.2 ; v3(88.268,86.07) cw(c88.298,86.07) 88.298,86.1 88.3,86.1 ccw(c88.356,86.1) 88.356,86.044 C7.2 ; C10.2 92.9,83.2 92.9,83.213 v3(92.929,83.213) ; pad.17 ccw(c95.162,77.9) 95.162,77.838 C13.2 98.488,77.838 C14.2 ; C9.2 98.2,85.7 v3(98.3,85.7) ; v3(103.482,82.069) 103.5,82.069 103.5,82.1 ccw(c103.529,82.1) 103.529,82.071 R7.1
  other v1: 92,56 94,56 96,56 100,56 102,56 104,56 108,56 118,56 120,56 122,56 93,58 95,58 111,58 119,58 92,60 94,60 96,60 108,60 122,60 91,62 93,62 95,62 97,62 107,62 111,62 113,62 125,62 88,64 90,64 92,64 94,64 96,64 106,64 108,64 112,64 124,64 89,66 91,66 93,66 95,66 97,66 105,66 107,66 125,66 88,68 92,68 94,68 96,68 100,68 110,68 120,68 124,68 89,70 93,70 101,70 111,70 113,70 123,70 88,72 92,72 114,72 124,72 89,74 111,74 113,74 115,74 117,74 88,76 92,76 94,76 89,78 93,78 115,78 117,78 119,78 121,78 94,80 96,80 98,80 100,80 110,80 89,82 97,82 99,82 109,82 113,82 123,82 125,82 88,84 110,84 118,84 120,84 124,84 101,86 103,86 109,86 119,86 123,86 125,86 110,88 112,88 116,88 120,88 124,88 91,90 97,90 99,90 101,90 103,90 105,90 111,90 119,90 123,90 108,92 116,92 120,92
  other v2: 102.9,73.05 104,73.05 105.1,73.05 106.2,73.05 107.3,73.05 102.9,74.15 104,74.15 105.1,74.15 106.2,74.15 107.3,74.15 102.9,75.25 104,75.25 105.1,75.25 106.2,75.25 107.3,75.25 102.9,76.35 104,76.35 105.1,76.35 106.2,76.35 107.3,76.35 102.9,77.45 104,77.45 105.1,77.45 106.2,77.45 107.3,77.45 93,86.9 94.1,86.9 93,88 94.1,88
IMU_CPUOUT: C9.1 U3.20 | length 1.8
  L1 (SIGNAL) w0.25: U3.20 95.825,86.7 95.95,86.7 cw(c95.95,86.375) 95.968,86.699 97.14,86.635 C9.1
IMU_INT: U2.45 U3.12 | length 22.2
  L1 (SIGNAL) w0.25: U3.12 91.325,86.2 90.7,85.575 90.575,85.575 90,85 90,81.946 90.146,81.8 94.8,81.8 96,83 99,83 102.965,81.636 ccw(c103.482,82.069) 103.35,81.408 cw(c103.06,81.26) 103.379,81.321 103.566,80.344 ccw(c103.811,80.391) 103.698,80.168 103.702,80.167 cw(c103.593,79.942) 103.843,79.944 103.85,78.925 U2.45
IMU_REGOUT: C7.1 U3.10 | length 2.7
  L1 (SIGNAL) w0.25: C7.1 89.595,87.332 89.965,87.332 90.047,87.25 90.965,87.25 91.015,87.2 91.275,87.2 U3.10
IMU_SCL: R2.1 U2.42 U3.23 | length 18.6
  L1 (SIGNAL) w0.25: U3.23 98.8,88.2 99.282,87.718 v3(99.282,87.684) ; v3(105.051,86.851) 105.051,86.766 105.521,86.296 R2.1 105.644,83.289 105.644,79.701 cw(c105.394,79.701) 105.625,79.607 105.35,78.925 U2.42
  L4 (Signal) w0.25: v3(99.282,87.684) 104.316,87.684 105,87 105,86.902 v3(105.051,86.851)
IMU_SDA: R3.1 U2.43 U3.24 | length 18.6
  L1 (SIGNAL) w0.25: U3.24 99.366,88.7 99.562,88.896 103.104,88.896 103.979,88.021 R3.1 104.211,83.289 104.791,82.517 cw(c104.531,82.321) 104.856,82.339 104.862,82.238 ; U2.43 104.85,78.925 105.005,79.529 ccw(c104.763,79.591) 105.013,79.605 104.877,81.969 cw(c105.127,81.982) 104.878,82.003 104.879,82.021 ccw(c104.306,82.071) 104.867,82.198 cw(c105.111,82.252) 104.862,82.236
LED_PWR_K: D1.2 R1.2 | length 3
  L1 (SIGNAL) w0.25: R1.2 122.068,65.875 122.568,65.375 D1.2
MCU_BOOT0: R7.2 U2.44 | length 2.7
  L1 (SIGNAL) w0.25: R7.2 104.406,81.196 104.476,79.542 cw(c104.227,79.531) 104.471,79.479 ; U2.44 104.35,78.925 104.471,79.478
MCU_LED_A: D2.2 U2.26 | length 2.1
  L1 (SIGNAL) w0.25: U2.26 108.775,73 109.414,73.025 ; 109.415,73.025 cw(c109.424,72.775) 109.424,73.025 110.437,73.025 D2.2
MCU_LED_K: D2.1 R4.2 | length 1.6
  L1 (SIGNAL) w0.25: D2.1 111.499,72.9 111.499,71.65 R4.2
MCU_NRST: C11.1 J2.3 R5.1 U2.7 | length 38.8
  L1 (SIGNAL) w0.25: v4(100,75) U2.7 ; v3(112.5,92.5) 113.977,91.023 114.465,91.023 115.115,90.374 115.115,90.135 C11.1 R5.1 116.725,90 114.69,87.966 J2.3
  L4 (Signal) w0.25: v4(100,75) 100,78.5 101.4,79.9 105.6,79.9 107.9,82.2 107.9,88.4 109.5,90 109.5,92.3 109.7,92.5 v3(112.5,92.5)
MCU_OSC_IN: C5.2 U2.5 Y1.1 | length 13.2
  L1 (SIGNAL) w0.25: Y1.1 95.125,71.025 95.869,71.943 ccw(c95.675,72.101) 95.925,72.101 95.925,74.005 C5.2 95.995,74.495 96,76.018 ; 96,76.019 96,76.75 cw(c96.25,76.75) 96.25,77 100,77 cw(c100,75.31) 100.854,76.768 cw(c100.727,76.553) 100.976,76.535 ccw(c101.425,76.5) 101.354,76.056 U2.5
MCU_OSC_OUT: C12.1 R6.2 U2.6 U2.22 | length 5.8
  L1 (SIGNAL) w0.25: R6.2 99.198,75.5 99.323,75.625 100.521,75.625 100.646,75.5 U2.6 ; U2.22 106.85,70.1 C12.1
MCU_PA4: J3.2 U2.14 | length 11.3
  L1 (SIGNAL) w0.25: J3.2 100.3,61.6 101.933,67.752 ccw(c101.692,67.816) 101.935,67.757 102.85,71.575 U2.14
MCU_PA5: J3.3 U2.15 | length 11.2
  L1 (SIGNAL) w0.25: J3.3 101.55,61.6 103.35,71.575 U2.15
MCU_PA6: J3.4 U2.16 | length 11.1
  L1 (SIGNAL) w0.25: J3.4 102.8,61.6 103.85,71.575 U2.16
MCU_PA7: J3.5 U2.17 | length 11
  L1 (SIGNAL) w0.25: J3.5 104.05,61.6 104.35,71.575 U2.17
MCU_SWCLK: J2.4 U2.37 | length 9.3
  L1 (SIGNAL) w0.25: U2.37 107.85,78.925 108.656,79.866 cw(c108.845,79.703) 108.691,79.9 114.497,84.441 ccw(c114.297,84.697) 114.565,84.514 J2.4
MCU_SWDIO: J2.2 U2.34 | length 12.3
  L1 (SIGNAL) w0.25: U2.34 112,77 113,78 113.592,78.667 ccw(c113.405,78.833) 113.638,78.742 J2.2
MCU_SWO: J2.6 U2.39 | length 9.1
  L1 (SIGNAL) w0.25: U2.39 106.85,78.925 106.945,79.121 cw(c107.35,78.925) 106.996,79.202 107.389,79.705 cw(c107.586,79.551) 107.436,79.751 112.643,83.66 ccw(c112.15,84.316) 112.822,83.844 J2.6
USB_D_N: J1.2 U2.32 | length 16.4
  L1 (SIGNAL) w0.26: U2.32 108.765,76 108.783,76.018 121.849,76.018 122.089,75.778 124.667,75.778 J1.2
USB_D_P: J1.3 U2.33 | length 16.4
  L1 (SIGNAL) w0.26: U2.33 108.765,76.5 108.783,76.482 122.041,76.482 122.281,76.242 124.667,76.242 J1.3
VBUS: C1.1 FB1.1 J1.1
XTAL_IN: C6.2 R6.1 Y1.3 | length 3.2
  L1 (SIGNAL) w0.25: Y1.3 97,72.775 97,75.4 R6.1
pads on no net: J1.4 J1.6 J1.7 J1.8 J1.9 J1.10 J1.11 J2. J3.MP1 J3.MP2 U2.2 U2.3 U2.4 U2.10 U2.11 U2.12 U2.13 U2.18 U2.19 U2.20 U2.21 U2.25 U2.27 U2.28 U2.29 U2.30 U2.31 U2.38 U2.40 U2.41 U2.46 U3.2 U3.3 U3.4 U3.5 U3.6 U3.7 U3.14 U3.15 U3.16 U3.17 U3.19 U3.21 U3.22

## Polygon pours and split planes (outlines as drawn)
GND on L1 (SIGNAL) "GND_L01_P005" (solid, pour order 14): 118.945,62.808 121.566,62.775 121.624,66.81 122.026,71.675 118.599,71.495 115.904,68.889 116.003,65.274 118.928,62.8
+3V3 on L1 (SIGNAL) "+3V3_L01_P002" (solid, pour order 5): 112.2,60.2 112.6,59.8 112.6,57.8 117.9,57.8 121.1,61 121.1,62.5 120.9,62.7 117.8,62.7 117.8,63.2 115.6,65.4 115.6,67 113.9,67 113.6,66.7 113.7,66.6 113.7,61.7
+5V on L1 (SIGNAL) "+5V_L01_P001" (solid, pour order 4): 118.5,72.75 117.05,72.75 114,69.7 114,68 112.5,68 111.3,66.8 111.3,65.1 113.2,65.1 113.3,65 113.4,65.1 113.4,66.9 113.9,66.9 114.3,67.3 115.8,67.3 115.9,67.4 115.9,69.8 116.7,69.8 118.5,71.6 120,71.6 120.4,72 120.4,74.6 120.3,74.7 119.1,74.7 118.4,74 118.5,73.9
VBUS on L1 (SIGNAL) "VBUS" (solid, pour order 3): 121.3,75.4 120.8,74.9 120.8,71.7 122.7,71.7 122.7,74.2 123.3,74.2 123.9,74.8 125.6,74.8 125.6,75.3 125.5,75.4
GND on L2 (GND) "GND_L02_P007" (solid, pour order 7): 86,92.46 cw(c88.54,92.46) 88.54,95 124.46,95 cw(c124.46,92.46) 127,92.46 127,57.54 cw(c124.46,57.54) 124.46,55 88,55 cw(c88,57) 86,57 86,78
GND on L3 (GND) "GND_L03_P009" (solid, pour order 9): 86,92.46 cw(c88.54,92.46) 88.54,95 124.46,95 cw(c124.46,92.46) 127,92.46 127,57.54 cw(c124.46,57.54) 124.46,55 88,55 cw(c88,57) 86,57 86,78

## Silkscreen, mask and mechanical layers (free items; w line width, h text height)
Top Overlay:
  text "SWD" at 115.85,80.354 h1.52
  text "USB" at 124.05,69.654 h1.52
  text "GPIO" at 99.95,62.938 h1.52
Mechanical 1:
  lines w0.254: 85,56.27 ccw(c88.066,56.27) 85.898,54.102 86.102,53.898 ccw(c88.27,56.066) 88.27,53 125.73,53 ccw(c125.73,56.066) 127.898,53.898 128.102,54.102 ccw(c125.934,56.27) 129,56.27 129,93.73 ccw(c125.934,93.73) 128.102,95.898 127.898,96.102 ccw(c125.73,93.934) 125.73,97 88.27,97 ccw(c88.27,93.934) 86.102,96.102 85.898,95.898 ccw(c88.066,93.73) 85,93.73 85,92 85,56.27